# EAGLE board Codeshelf-0006.v01 (EAGLE 6.5.0)
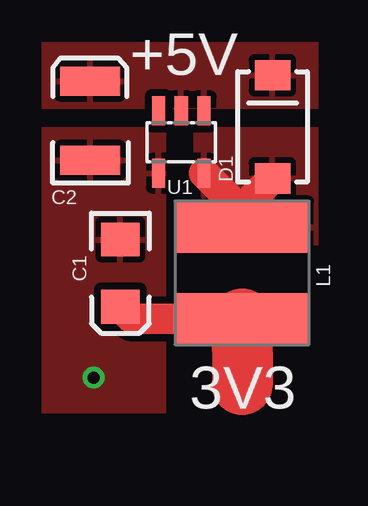
[diagram p0: board, top side]
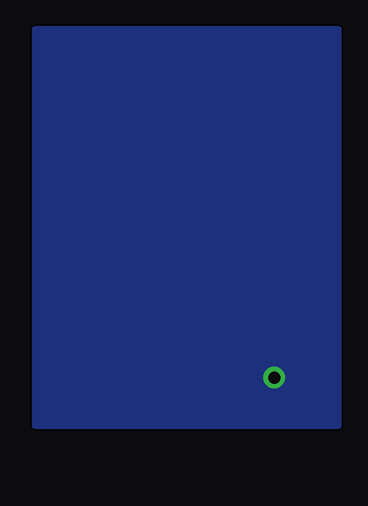
[diagram p1: board, bottom side, seen from below]

No outline drawn. Coordinates in mm, seen from the top.
Copper layers (1*16): Top 0.035mm / dielectric 1.5mm / Bottom 0.035mm
Design rules "default": minimum track width 10mil, minimum drill 24mil, track to track 8mil, track to pad 8mil, pad to pad 8mil, via to via 8mil, smd to smd 8mil, copper to edge 40mil, drill to drill 8mil, minimum pad ring 10mil, minimum via ring 8mil, stop-mask expansion 4mil, vias tented up to drill 0mil, thermal gap 10mil
tRestrict: 4 lines

## Footprints (pad centres in the part's own frame; a part is rotated, then mirrored left to right if it is on the bottom)
EIA3216 = smd 1.4 x 1.6: A 1.4,0; C -1.4,0
EIA3528 = smd 1.2 x 2.5: A 1.65,0; C -1.65,0
SMA-DIODE = smd 1.27 x 1.47: A -2.15,0; C 2.15,0
CR54 = smd 5.5 x 2.15: P$1 0,1.92; P$2 0,-1.92
SOT23-5 = smd 0.55 x 1.2: 1 -0.95,-1.3; 2 0,-1.3; 3 0.95,-1.3; 4 0.95,1.3; 5 -0.95,1.3

## Placement (x,y rotation side)
C1  10uF  [EIA3216]  3.81,6.35 270 top
C2  68uF  [EIA3528]  2.54,12.7 90 top
D1  MBRA140  [SMA-DIODE]  10.16,12.45 90 top
L1  47uH  [CR54]  8.89,6.35 180 top
U1  NCP1402  [SOT23-5]  6.35,11.81 180 top

## Library data of the parts
C1 C2 D1 L1 U1 = SparkFun

## Nets
+3V3: C1.A L1.P$1
+5V: C2.A D1.C U1.1 U1.2
GND: C1.C C2.C U1.4
N$3: D1.A L1.P$2 U1.5

## Tracks (layer width: path | path; a pad name or v marks a point on that pad's centre or on a via)
+3V3
  Top 1.27: 8.88,4.45 4.32,4.45 C1.A
  Top 1.524: 8.88,4.45 L1.P$1
  Top 2.54: L1.P$1 8.9,1.7
+5V
  pour Top (isolate 0.305): 12.7,16.51 0,16.51 0,13.34 12.7,13.34
GND  (via drill 0.5)
  other vias: 2.7,2
  pour Top (isolate 0.305): 0,12.32 5.59,12.32 5.59,0.25 0,0.25
  pour Bottom (isolate 0.305): 0,0 0,16.51 12.7,16.51 12.7,0
N$3
  Top 1.27: D1.A 8.89,9.03 L1.P$2 8.89,8.92 U1.5
  pour Top (isolate 0.305): 6.99,12.32 12.7,12.32 12.7,7.62 6.99,7.62

## Text on the board
tPlace: +5V | 3V3